# Altium PCB AX309.REV.1.0.PcbDoc (part 10 of 10)
Units mil, origin at the board's own origin, x right, y up, seen from the top; angles counter-clockwise.
Board outline 5185 x 3614 mil, 4 copper layers (Top Layer, GND, Mid-Layer 1, Bottom Layer); 191 components, 352 nets, 1106 pads, 425 vias.
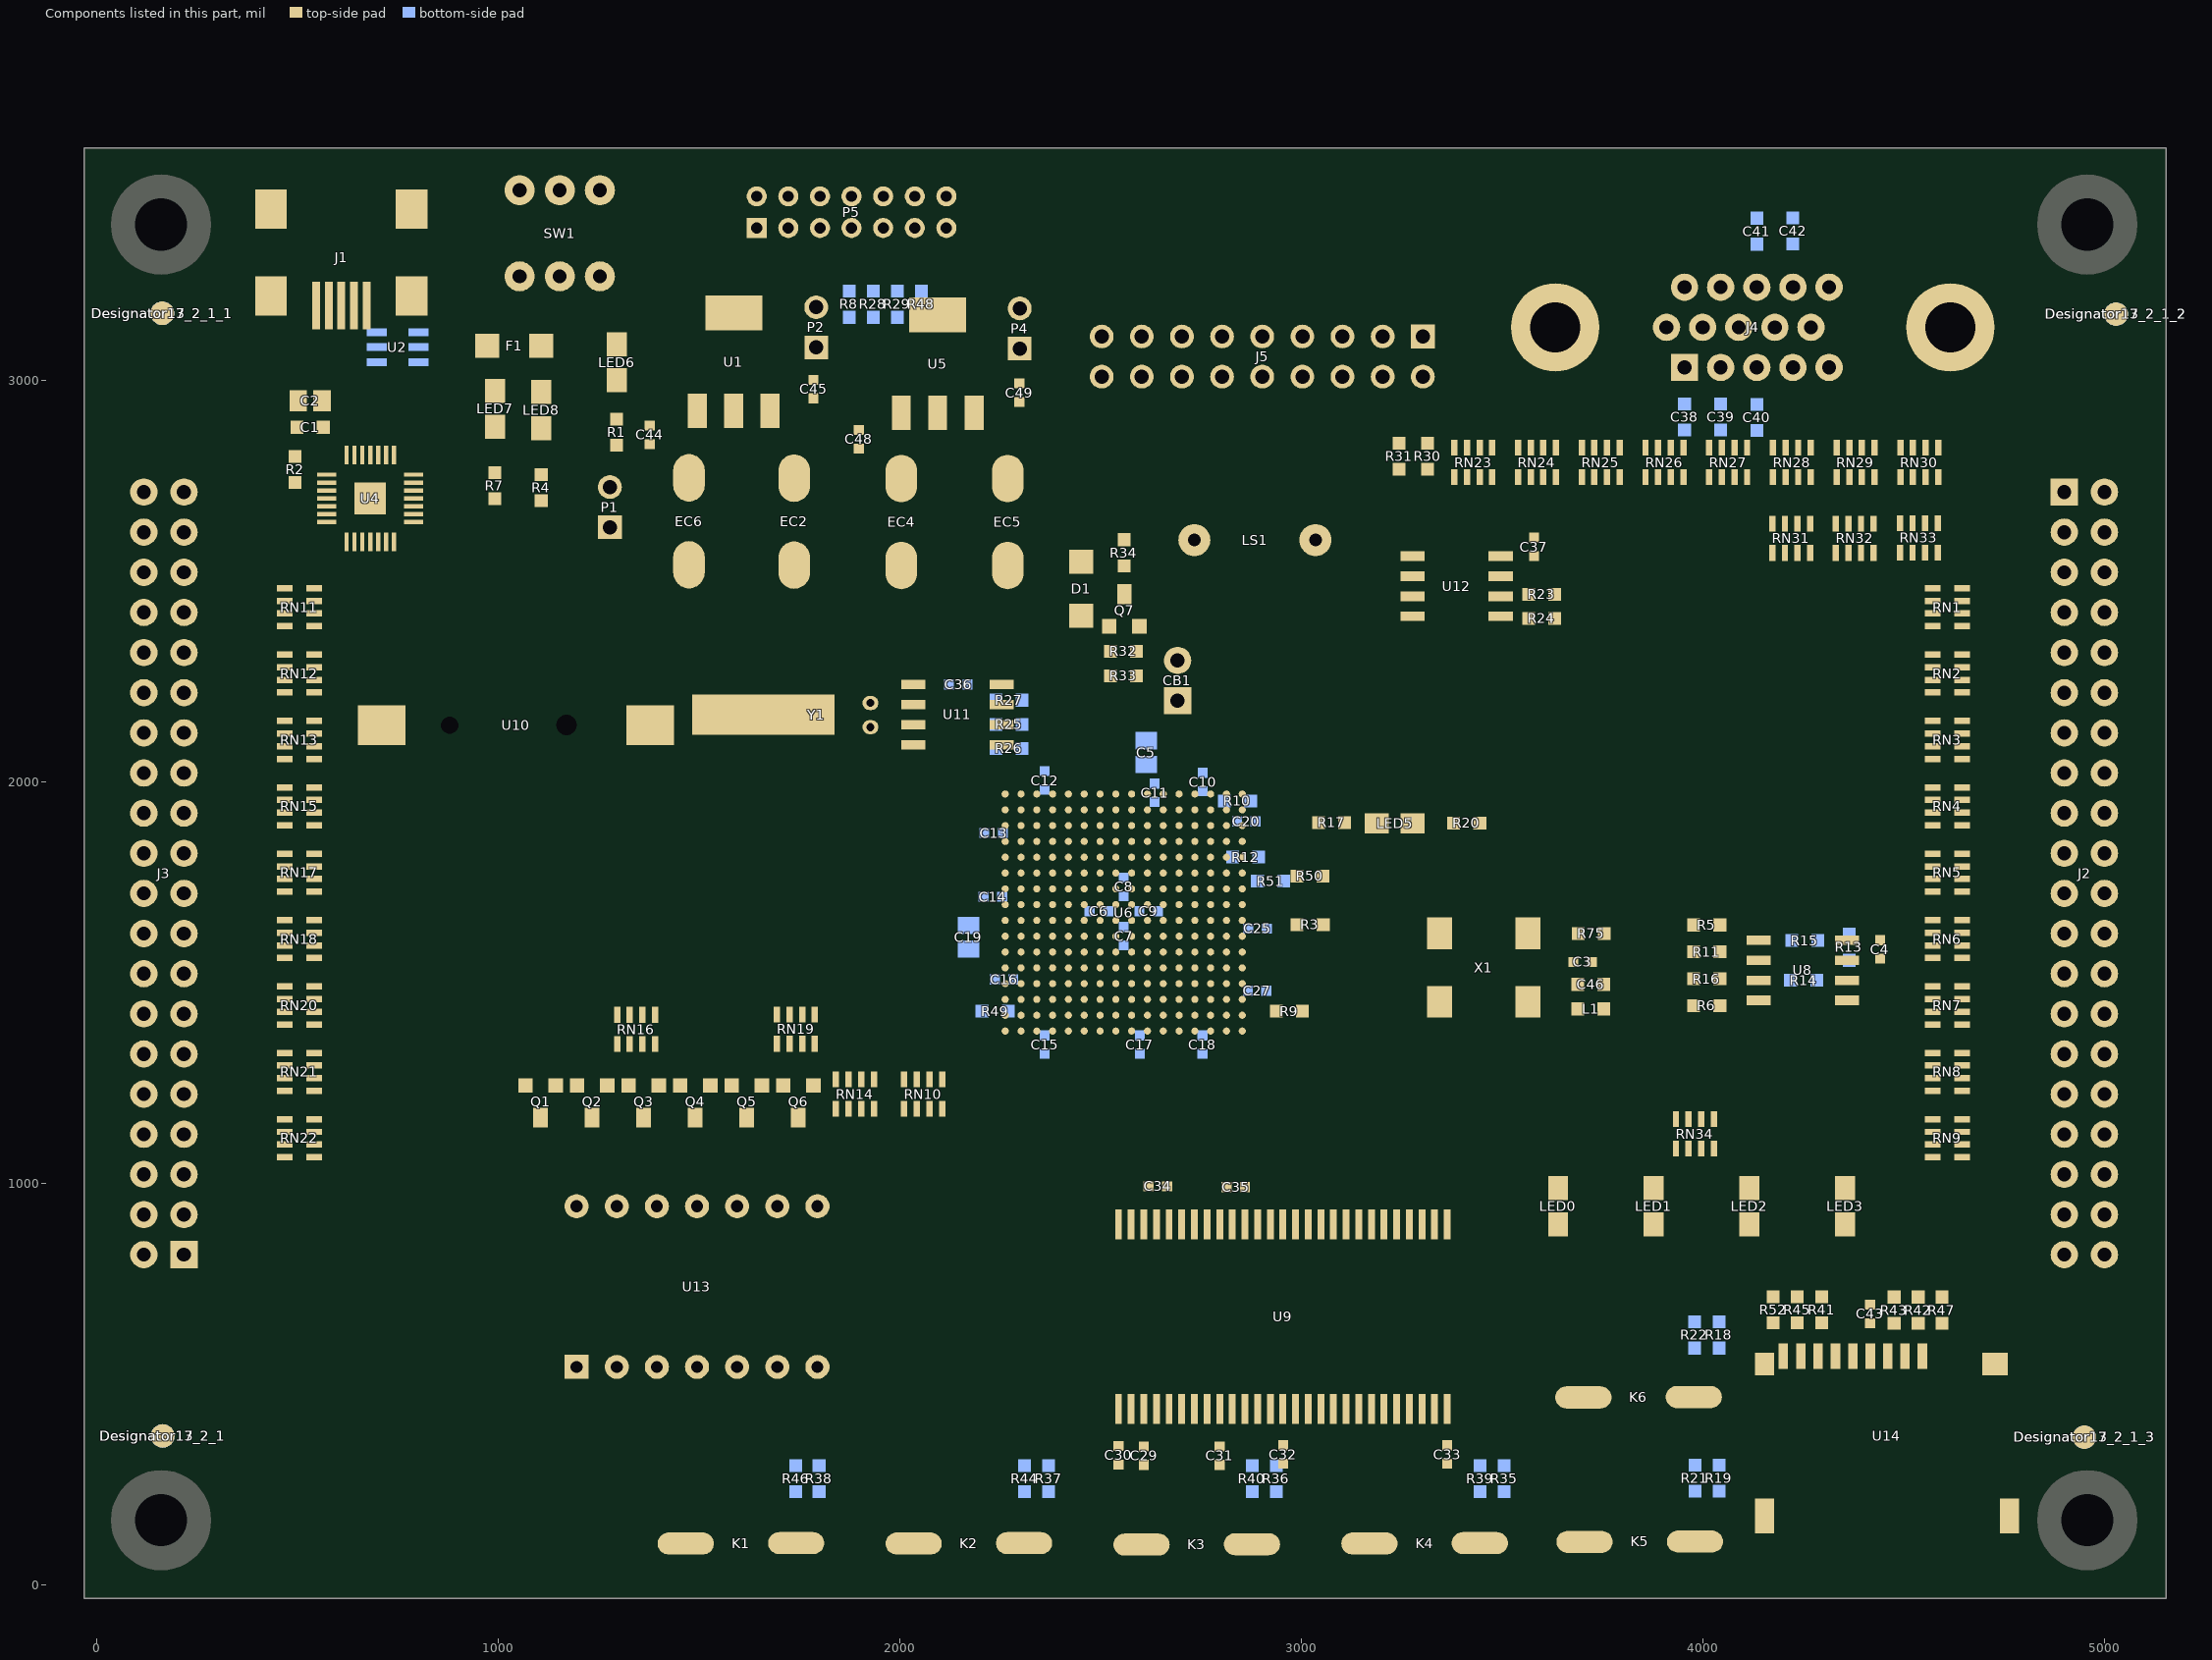
[diagram p12: the components of this part, seen from the top]

## Via types
v1: diameter 20, hole 10, Top Layer to Bottom Layer, 328 vias
v2: diameter 30, hole 15, Top Layer to Bottom Layer, 95 vias
v3: diameter 40, hole 20, Top Layer to Bottom Layer, 2 vias

## Nets (pads, with @x,y where several pads share a name; then routed paths per layer and width w, separated by ;. In a path a pad name is that pad's centre, name@x,y a point inside that pad or via, vN(x,y) a via of type N, cw(c..) or ccw(c..) an arc to the next point about the centre after c; other vN are vias at no path point) (continued)
copper on no net: (continued)
  Top Layer w0.7: 1160.7,143.2 1182.63,143.2 ; 1160.7,183.1 1200.13,183.1 ; 1160.7,183.8 1200.83,183.8 ; 1161.4,143.9 1181.93,143.9 ; 1161.4,181.7 1198.73,181.7 ; 1161.4,182.4 1199.43,182.4 ; 1162.1,144.6 1181.93,144.6 ; 1162.1,180.3 1197.33,180.3 ; 1162.1,181 1198.03,181 ; 1162.8,145.3 1181.23,145.3 ; 1162.8,179.6 1196.63,179.6 ; 1163.5,146 1181.23,146 ; 1163.5,178.2 1195.23,178.2 ; 1163.5,178.9 1195.93,178.9 ; 1164.2,146.7 1180.53,146.7 ; 1164.2,176.8 1193.83,176.8 ; 1164.2,177.5 1194.53,177.5 ; 1164.9,147.4 1180.53,147.4 ; 1164.9,175.4 1192.43,175.4 ; 1164.9,176.1 1193.13,176.1 ; 1165.6,148.1 1179.83,148.1 ; 1165.6,174.7 1191.73,174.7 ; 1166.3,148.8 1179.83,148.8 ; 1166.3,149.5 1179.13,149.5 ; 1166.3,173.3 1190.33,173.3 ; 1166.3,174 1191.03,174 ; 1167,150.2 1179.13,150.2 ; 1167,171.9 1188.93,171.9 ; 1167,172.6 1189.63,172.6 ; 1167.7,150.9 1178.43,150.9 ; 1167.7,170.5 1187.53,170.5 ; 1167.7,171.2 1188.23,171.2 ; 1168.4,151.6 1178.43,151.6 ; 1168.4,169.8 1186.83,169.8 ; 1169.1,152.3 1177.73,152.3 ; 1169.1,168.4 1185.43,168.4 ; 1169.1,169.1 1186.13,169.1 ; 1169.8,153 1177.03,153 ; 1169.8,167 1184.03,167 ; 1169.8,167.7 1184.73,167.7 ; 1170.5,153.7 1177.03,153.7 ; 1170.5,165.6 1182.63,165.6 ; 1170.5,166.3 1183.33,166.3 ; 1171.2,154.4 1176.33,154.4 ; 1171.2,164.9 1181.93,164.9 ; 1171.9,155.1 1176.33,155.1 ; 1171.9,163.5 1180.53,163.5 ; 1171.9,164.2 1181.23,164.2 ; 1172.6,155.8 1175.63,155.8 ; 1172.6,162.1 1179.13,162.1 ; 1172.6,162.8 1179.83,162.8 ; 1173.3,156.5 1175.63,156.5 ; 1173.3,160.7 1177.73,160.7 ; 1173.3,161.4 1178.43,161.4 ; 1174,157.2 1174.93,157.2 ; 1174,157.9 1174.93,157.9 ; 1174,159.3 1176.33,159.3 ; 1174,160 1177.03,160 ; 1174.7,158.6 1175.63,158.6 ; 1190.8,157.9 1259.63,157.9 ; 1191.5,156.5 1258.23,156.5 ; 1191.5,157.2 1258.93,157.2 ; 1191.5,158.6 1260.33,158.6 ; 1192.2,155.1 1257.53,155.1 ; 1192.2,155.8 1257.53,155.8 ; 1192.2,159.3 1261.03,159.3 ; 1192.9,153.7 1256.13,153.7 ; 1192.9,154.4 1256.83,154.4 ; 1192.9,160 1261.73,160 ; 1193.6,152.3 1254.73,152.3 ; 1193.6,153 1255.43,153 ; 1193.6,160.7 1262.43,160.7 ; 1194.3,150.9 1253.33,150.9 ; 1194.3,151.6 1254.03,151.6 ; 1194.3,161.4 1263.13,161.4 ; 1195,149.5 1253.33,149.5 ; 1195,150.2 1252.63,150.2 ; 1195,162.1 1263.83,162.1 ; 1195.7,148.8 1253.33,148.8 ; 1195.7,162.8 1264.53,162.8 ; 1196.4,147.4 1254.03,147.4 ; 1196.4,148.1 1254.03,148.1 ; 1196.4,163.5 1265.23,163.5 ; 1197.1,146 1254.73,146 ; 1197.1,146.7 1254.73,146.7 ; 1197.1,164.2 1265.93,164.2 ; 1197.8,144.6 1255.43,144.6 ; 1197.8,145.3 1255.43,145.3 ; 1197.8,164.9 1265.93,164.9 ; 1198.5,143.2 1256.13,143.2 ; 1198.5,143.9 1256.13,143.9 ; 1198.5,165.6 1266.63,165.6 ; 1199.2,141.8 1257.53,141.8 ; 1199.2,142.5 1256.83,142.5 ; 1199.2,166.3 1267.33,166.3 ; 1199.9,140.4 1258.23,140.4 ; 1199.9,141.1 1257.53,141.1 ; 1199.9,167 1268.03,167 ; 1200.6,139 1258.93,139 ; 1200.6,139.7 1258.23,139.7 ; 1200.6,167.7 1268.73,167.7 ; 1201.3,137.6 1259.63,137.6 ; 1201.3,138.3 1258.93,138.3 ; 1201.3,168.4 1269.43,168.4 ; 1202,136.2 1260.33,136.2 ; 1202,136.9 1259.63,136.9 ; 1202,169.1 1270.13,169.1 ; 1202.7,135.5 1260.33,135.5 ; 1202.7,169.8 1270.83,169.8 ; 1203.4,134.1 1261.03,134.1 ; 1203.4,134.8 1261.03,134.8 ; 1203.4,170.5 1271.53,170.5 ; 1204.1,132.7 1261.73,132.7 ; 1204.1,133.4 1261.73,133.4 ; 1204.1,171.2 1272.23,171.2 ; 1204.8,131.3 1263.13,131.3 ; 1204.8,132 1262.43,132 ; 1204.8,171.9 1272.93,171.9 ; 1205.5,129.9 1263.83,129.9 ; 1205.5,130.6 1263.13,130.6 ; 1205.5,172.6 1273.63,172.6 ; 1206.2,128.5 1264.53,128.5 ; 1206.2,129.2 1263.83,129.2 ; 1206.2,173.3 1274.33,173.3 ; 1206.9,127.1 1265.23,127.1 ; 1206.9,127.8 1264.53,127.8 ; 1206.9,174 1274.33,174 ; 1207.6,125.7 1265.93,125.7 ; 1207.6,126.4 1265.23,126.4 ; 1207.6,174.7 1275.03,174.7 ; 1208.3,124.3 1266.63,124.3 ; 1208.3,125 1265.93,125 ; 1208.3,175.4 1275.73,175.4 ; 1209,122.9 1267.33,122.9 ; 1209,123.6 1266.63,123.6 ; 1209,176.1 1276.43,176.1 ; 1209.7,122.2 1267.33,122.2 ; 1209.7,176.8 1277.13,176.8 ; 1210.4,120.8 1268.73,120.8 ; 1210.4,121.5 1268.03,121.5 ; 1210.4,177.5 1277.83,177.5 ; 1211.1,119.4 1269.43,119.4 ; 1211.1,120.1 1268.73,120.1 ; 1211.1,178.2 1278.53,178.2 ; 1211.8,118 1270.13,118 ; 1211.8,118.7 1269.43,118.7 ; 1211.8,178.9 1279.23,178.9 ; 1212.5,116.6 1270.83,116.6 ; 1212.5,117.3 1270.13,117.3 ; 1212.5,179.6 1279.93,179.6 ; 1213.2,115.2 1271.53,115.2 ; 1213.2,115.9 1270.83,115.9 ; 1213.2,180.3 1280.63,180.3 ; 1213.9,113.8 1272.23,113.8 ; 1213.9,114.5 1271.53,114.5 ; 1213.9,181 1281.33,181 ; 1214.6,112.4 1272.93,112.4 ; 1214.6,113.1 1272.23,113.1 ; 1214.6,181.7 1282.03,181.7 ; 1215.3,111.7 1273.63,111.7 ; 1215.3,182.4 1282.73,182.4 ; 1216,110.3 1274.33,110.3 ; 1216,111 1273.63,111 ; 1216,183.1 1282.73,183.1 ; 1216.7,108.9 1275.03,108.9 ; 1216.7,109.6 1274.33,109.6 ; 1216.7,183.8 1283.43,183.8 ; 1217.4,107.5 1275.73,107.5 ; 1217.4,108.2 1275.03,108.2 ; 1217.4,184.5 1284.13,184.5 ; 1218.1,106.8 1275.73,106.8 ; 1218.1,185.2 1284.83,185.2 ; 1218.8,105.4 1276.43,105.4 ; 1218.8,106.1 1276.43,106.1 ; 1218.8,185.9 1285.53,185.9 ; 1219.5,104 1277.13,104 ; 1219.5,104.7 1277.13,104.7 ; 1219.5,186.6 1286.23,186.6 ; 1220.2,102.6 1277.83,102.6 ; 1220.2,103.3 1277.83,103.3 ; 1220.2,187.3 1286.93,187.3 ; 1220.9,101.2 1279.23,101.2 ; 1220.9,101.9 1278.53,101.9 ; 1220.9,188 1287.63,188 ; 1221.6,99.8 1279.93,99.8 ; 1221.6,100.5 1279.23,100.5 ; 1221.6,188.7 1288.33,188.7 ; 1222.3,98.4 1280.63,98.4 ; 1222.3,99.1 1279.93,99.1 ; 1222.3,189.4 1289.03,189.4 ; 1223,97 1281.33,97 ; 1223,97.7 1280.63,97.7 ; 1223,190.1 1289.73,190.1 ; 1223.7,95.6 1282.03,95.6 ; 1223.7,96.3 1281.33,96.3 ; 1223.7,190.8 1290.43,190.8 ; 1224.4,94.2 1282.73,94.2 ; 1224.4,94.9 1282.03,94.9 ; 1224.4,191.5 1291.13,191.5 ; 1225.1,92.8 1283.43,92.8 ; 1225.1,93.5 1282.73,93.5 ; 1225.1,192.2 1291.83,192.2 ; 1225.8,91.4 1284.13,91.4 ; 1225.8,92.1 1284.13,92.1 ; 1225.8,192.9 1291.83,192.9 ; 1226.5,90 1284.83,90 ; 1226.5,90.7 1284.83,90.7 ; 1226.5,193.6 1292.53,193.6 ; 1227.2,89.3 1285.53,89.3 ; 1227.2,194.3 1293.23,194.3 ; 1227.9,87.9 1286.23,87.9 ; 1227.9,88.6 1285.53,88.6 ; 1227.9,195 1293.93,195 ; 1228.6,86.5 1286.93,86.5 ; 1228.6,87.2 1286.23,87.2 ; 1228.6,195.7 1294.63,195.7 ; 1229.3,85.1 1287.63,85.1 ; 1229.3,85.8 1286.93,85.8 ; 1229.3,196.4 1295.33,196.4 ; 1230,83.7 1288.33,83.7 ; 1230,84.4 1287.63,84.4 ; 1230,197.1 1296.03,197.1 ; 1230,197.8 1296.73,197.8 ; 1230.7,82.3 1289.03,82.3 ; 1230.7,83 1288.33,83 ; 1230.7,198.5 1297.43,198.5 ; 1231.4,80.9 1289.73,80.9 ; 1231.4,81.6 1289.73,81.6 ; 1231.4,199.2 1298.13,199.2 ; 1232.1,79.5 1290.43,79.5 ; 1232.1,80.2 1290.43,80.2 ; 1232.1,199.9 1298.83,199.9 ; 1232.8,78.1 1291.13,78.1 ; 1232.8,78.8 1291.13,78.8 ; 1232.8,200.6 1299.53,200.6 ; 1233.5,76.7 1291.83,76.7 ; 1233.5,77.4 1291.83,77.4 ; 1233.5,201.3 1300.23,201.3 ; 1234.2,75.3 1292.53,75.3 ; 1234.2,76 1292.53,76 ; 1234.2,202 1300.23,202 ; 1234.9,73.9 1293.23,73.9 ; 1234.9,74.6 1293.23,74.6 ; 1234.9,202.7 1300.93,202.7 ; 1235.6,72.5 1294.63,72.5 ; 1235.6,73.2 1293.93,73.2 ; 1235.6,203.4 1301.63,203.4 ; 1235.6,204.1 1302.33,204.1 ; 1236.3,71.1 1295.33,71.1 ; 1236.3,71.8 1294.63,71.8 ; 1236.3,204.8 1303.03,204.8 ; 1237,70.4 1295.33,70.4 ; 1237,205.5 1303.73,205.5 ; 1237.7,69 1296.03,69 ; 1237.7,69.7 1296.03,69.7 ; 1237.7,206.2 1304.43,206.2 ; 1238.4,67.6 1296.73,67.6 ; 1238.4,68.3 1296.73,68.3 ; 1238.4,206.9 1305.13,206.9 ; 1239.1,66.2 1297.43,66.2 ; 1239.1,66.9 1297.43,66.9 ; 1239.1,207.6 1305.83,207.6 ; 1239.8,64.8 1298.13,64.8 ; 1239.8,65.5 1298.13,65.5 ; 1239.8,208.3 1306.53,208.3 ; 1240.5,63.4 1298.83,63.4 ; 1240.5,64.1 1298.83,64.1 ; 1240.5,209 1307.23,209 ; 1240.5,209.7 1307.93,209.7 ; 1241.2,62 1300.23,62 ; 1241.2,62.7 1299.53,62.7 ; 1241.2,210.4 1308.63,210.4 ; 1241.9,60.6 1300.93,60.6 ; 1241.9,61.3 1300.23,61.3 ; 1241.9,211.1 1308.63,211.1 ; 1242.6,59.9 1300.93,59.9 ; 1242.6,211.8 1309.33,211.8 ; 1243.3,212.5 1310.03,212.5 ; 1244,213.2 1310.73,213.2 ; 1244.7,213.9 1311.43,213.9 ; 1245.4,214.6 1312.13,214.6 ; 1245.4,215.3 1312.83,215.3 ; 1246.1,216 1313.53,216 ; 1246.8,216.7 1314.23,216.7 ; 1247.5,217.4 1314.93,217.4 ; 1248.2,218.1 1315.63,218.1 ; 1248.9,218.8 1316.33,218.8 ; 1249.6,219.5 1317.03,219.5 ; 1250.3,220.2 1317.03,220.2 ; 1250.3,220.9 1317.73,220.9 ; 1251,221.6 1318.43,221.6 ; 1251.7,222.3 1319.13,222.3 ; 1252.4,223 1319.83,223 ; 1253.1,223.7 1320.53,223.7 ; 1253.8,224.4 1321.23,224.4 ; 1254.5,225.1 1321.93,225.1 ; 1255.2,225.8 1322.63,225.8 ; 1255.2,226.5 1323.33,226.5 ; 1255.9,227.2 1324.03,227.2 ; 1256.6,227.9 1324.73,227.9 ; 1257.3,228.6 1325.43,228.6 ; 1258,229.3 1325.43,229.3 ; 1258.7,230 1326.13,230 ; 1259.4,230.7 1326.83,230.7 ; 1260.1,231.4 1327.53,231.4 ; 1260.8,232.1 1328.23,232.1 ; 1260.8,232.8 1328.93,232.8 ; 1261.5,233.5 1329.63,233.5 ; 1262.2,234.2 1330.33,234.2 ; 1262.9,234.9 1331.03,234.9 ; 1263.6,235.6 1331.73,235.6 ; 1264.3,236.3 1332.43,236.3 ; 1265,237 1333.13,237 ; 1265.7,237.7 1333.83,237.7 ; 1265.7,238.4 1333.83,238.4 ; 1266.4,239.1 1334.53,239.1 ; 1267.1,239.8 1335.23,239.8 ; 1267.8,240.5 1335.93,240.5 ; 1268.5,241.2 1336.63,241.2 ; 1269.2,241.9 1337.33,241.9 ; 1269.9,242.6 1338.03,242.6 ; 1270.6,243.3 1338.73,243.3 ; 1270.6,244 1339.43,244 ; 1271.3,244.7 1340.13,244.7 ; 1272,245.4 1340.83,245.4

## Polygon pours and split planes (outlines as drawn)
D1V2 on Mid-Layer 1 "Bottom Layer-No Net" (solid, pour order 2): 2453,1779 2660.95,1779 2662,1779 2662,1568 2454.05,1568 2453,1568 2453,1779
D3V3 on Bottom Layer "Bottom Layer-No Net" (solid, remove dead copper, pour order 3): 2300,1963 2915,1963 2915,1807 2915,1382 2747,1382 2300,1382 2300,1963
GND on Bottom Layer "Bottom Layer-No Net" (hatched 45Degree grid 20 track 8, remove dead copper, pour order 6): 120.71,3543.01 5118.11,3543.01 5118.11,3388 5118.11,0 4969,0 0,0 0,297 0,3543.31 121.01,3543.31
GND on GND (split plane): 5133.9,3242.3 5133.9,-14.6 -10.9,-14.6 -10.9,3559.2 5133.9,3559.2

## Keep-outs
Keep-Out Layer:
  lines w8: 0,121.01 0,3422.3 cw(c120.71,3422.3) 120.71,3543.01 ; 0.29,121.01 ccw(c121,121.01) 121,0.3 ; 117,0 4997.29,0 ccw(c4997.3,120.71) 5118.01,120.71 ; 121.01,3543.31 4997.29,3543.31 ; 4997.29,3543.01 cw(c4997.29,3422.3) 5118,3422.3 ; 5118.11,117.3 5118.11,3422.3

## Other copper
Top Layer:
  rectangle net VCC: 1219,3228 1579,3512
  rectangle net D3V3: 2398,207 2454,440
  rectangle net D3V3: 3821,1431 3878,1487
  rectangle net NetC3_1: 3533,1412 3691,1543
  rectangle net VBUS: 662,3066 733,3246
  rectangle net GND: 482,3049 556,3245
  rectangle net NetF1_2: 1111,3068 1196,3514
  rectangle net VBUS: 662,3056 1002,3116
  rectangle net D3V3: 1563,2697 1611,3182
  rectangle net D3V3: 1241,2697 1611,2854
  rectangle net VCC: 1654,2695 1806,2969
  rectangle net D1V2: 2072,2690 2119,3206
  rectangle net D1V2: 1885,2690 2119,2844
  rectangle net D3V3: 2162,2686 2314,2963
  rectangle net GND: 1364,2874 1520,3085
  rectangle net GND: 1885,2863 2028,2963
  rectangle net GND: 1246,2474 2316,2607
  rectangle net GND: 4130,130 4179,310
  rectangle net GND: 4741,127 4788,311
  rectangle net GND: 4697,438 4761,576
  rectangle net D1V2: 2023,3120 2333,3213
  rectangle net VCC: 551,2791 627,2840
  rectangle net GND: 651,2092 768,2287
  rectangle net VCC: 549,2759 597,2840
  rectangle net NetF1_2: 1077,3053 1196,3107
  rectangle net GND: 3313,1583 3420,1662
  rectangle net GND: 1249,2482 1307,2661
Mid-Layer 1:
  rectangle net D3V3: 3818,1358 3877,1487
  rectangle net D1V2: 1894,2679 2579,2857
  rectangle net D1V2: 2537,1735 2579,2833
  rectangle net D3V3: 1237,2694 1612,2863
Bottom Layer:
  rectangle net GND: 4843,874 5059,970
  rectangle net GND: 4853,2669 4951,2769.65
  rectangle net GND: 3858,3084.73 4129.65,3176
  rectangle net GND: 54,2576 274,2670
  rectangle net GND: 169,773.65 265,871.65
  rectangle net D3V3: 2654,1535 2697,1577
  rectangle net D3V3: 2575.5,1740 2620,1778.5
  rectangle net D3V3: 2215,2867 2316,2962
  rectangle net D3V3: 1242,2694 1613,3026
  rectangle net D3V3: 2419,1768.03 2463,1814
  rectangle net D3V3: 1418,1652 1507,2767
  rectangle net D3V3: 1418,1619 2317,1689
  rectangle net D3V3: 2260,1465.86 2305.5,1576
  rectangle net D3V3: 2810,1468 2846,1505
  rectangle net D3V3: 2812,1842.3 2846,1923.5
  rectangle net D3V3: 2613,1847 2659,1892
  rectangle net D3V3: 2862,1782 2915,1851.17
  rectangle net D3V3: 2245,1858 2304,1885
  rectangle net D3V3: 2455,1733 2501,1776
  rectangle net D3V3: 2243,1682 2303,1726

## Silkscreen, mask and mechanical layers (free items; w line width, h text height)
Top Overlay:
  drawing of 6031 lines, arcs and shapes, not listed
  text "PWR" at 895,3362 h80 r90
  text "VGA" at 3482,3361 h80 r90
  text "5V" at 1899,3159 h60 r90
  text "1.2V" at 2413,3141 h60 r90
  text "【39】" at 193,3112 h80 r270
  text "【40】" at 80,3111 h80 r270
  text "PWR" at 1235,3021 h60 r90
  text "GND" at 1899,2992 h60 r90
  text "GND" at 2415,2985 h60 r90
  text "【1】" at 4924,2964 h80 r90
  text "【2】" at 5031,2964 h80 r90
  text "CAMERA" at 2759,2867 h80
  text "3.3V" at 1201,2709 h60 r90
  text "IO: 3.3V" at 4769,2574 h100 r90
  text "GND" at 1201,2545 h60 r90
  text "IO: 3.3V" at 352,944 h100 r270
  text "【2】" at 93,573 h80 r270
  text "【1】" at 193,573 h80 r270
  text "【39】" at 4924,438 h80 r90
  text "【40】" at 5037,435 h80 r90
Bottom Overlay:
  lines w8: 301.61,1567.33 660,1567.33 ; 302,1067.33 660,1067.33 ; 302,1267.33 660,1267.33 ; 302.31,2167.33 657,2167.33 ; 302.62,1367.33 660,1367.33 ; 303,867.33 660,867.33 660,969.33 303,969.33 ; 303,1167.33 659,1167.33 ; 303,1467.33 659.16,1467.33 ; 303,1666.33 660,1666.33 ; 303,1767.33 659,1767.33 ; 303,1867.33 657,1867.33 ; 303,1967.33 659,1967.33 ; 303,2068.33 656.86,2068.33 ; 303,2267.33 656.87,2267.33 ; 303,2367.33 657,2367.33 ; 303,2467.33 659,2467.33 ; 303,2570.33 658,2570.33 ; 303,2667.33 657,2667.33 ; 478,767.68 479,767.68 479,2770.33 ; 4471,1871.67 4828,1871.67 ; 4471,1970.67 4829.39,1970.67 ; 4471,2170.67 4828.38,2170.67 ; 4471,2270.67 4829,2270.67 ; 4471,2470.67 4829,2470.67 ; 4471.84,2070.67 4828,2070.67 ; 4472,1070.67 4828,1070.67 ; 4472,1570.67 4828,1570.67 ; 4472,1770.67 4828,1770.67 ; 4472,2370.67 4828,2370.67 ; 4473,967.67 4828,967.67 ; 4474,870.67 4828,870.67 ; 4474,1170.67 4828,1170.67 ; 4474,1370.67 4828.69,1370.67 ; 4474,1670.67 4828,1670.67 ; 4474.13,1270.67 4828,1270.67 ; 4474.14,1469.67 4828,1469.67 ; 4652,767.67 4652,2770.32 4653,2770.32 ; 4828,2568.67 4471,2568.67 4471,2670.67 4828,2670.67
  lines w12: 303,2770.33 303,767.33 660,767.33 660,2772.33 303,2772.33 ; 4828,765.67 4471,765.67 4471,2770.67 4828,2770.67 4828,767.67
  text "【1】" at 4618,2806 h80
  text "【2】" at 4793,2804.38 h80
  text "3V3" at 647,2695 h80
  text "GND" at 4634,2694.67 h80
  text "3V3" at 468,2693 h80
  text "VCC" at 4815,2691.91 h80
  text "K16" at 4634,2594 h80
  text "J16" at 4815,2594 h80
  text "GND" at 468,2592 h80
  text "GND" at 647,2592 h80
  text "H16" at 468,2494 h80
  text "K15" at 4815,2494 h80
  text "L16" at 4634,2493 h80
  text "H15" at 647,2491 h80
  text "M15" at 4634,2397 h80
  text "M16" at 4815,2395 h80
  text "G16" at 468,2392 h80
  text "F16" at 647,2392 h80
  text "E16" at 647,2294 h80
  text "N16" at 4815,2293 h80
  text "F15" at 468,2292 h80
  text "P16" at 4634,2292 h80
  text "R16" at 4634,2195.67 h80
  text "P15" at 4815,2192.67 h80
  text "D11" at 468,2191 h80
  text "C10" at 647,2191 h80
  text "T15" at 4634,2095 h80
  text "C9" at 647,2093 h80
  text "R15" at 4815,2093.67 h80
  text "E11" at 468,2092 h80
  text "T14" at 4634,1995 h80
  text "E15" at 468,1993 h80
  text "R14" at 4815,1992.67 h80
  text "D16" at 647,1991 h80
  text "R12" at 4634,1895 h80
  text "C16" at 468,1894 h80
  text "T13" at 4815,1893 h80
  text "C15" at 647,1892 h80
  text "T12" at 4815,1794 h80
  text "R9" at 4634,1793 h80
  text "B16" at 468,1792 h80
  text "B15" at 647,1792 h80
  text "L8" at 4634,1695 h80
  text "T9" at 4815,1694 h80
  text "B14" at 468,1692 h80
  text "A14" at 647,1692 h80
  text "T7" at 4815,1596 h80
  text "R7" at 4634,1593 h80
  text "A13" at 468,1592.13 h80
  text "B12" at 647,1592.13 h80
  text "T5" at 4634,1495 h80
  text "A11" at 647,1494 h80
  text "T6" at 4815,1494 h80
  text "A12" at 468,1492 h80
  text "T4" at 4634,1396 h80
  text "R5" at 4810,1393.88 h80
  text "B10" at 468,1391.82 h80
  text "A10" at 647,1391 h80
  text "R2" at 4809,1295 h80
  text "R1" at 4633,1293 h80
  text "A9" at 468,1292 h80
  text "C8" at 647,1288 h80
  text "P2" at 4634,1196 h80
  text "A8" at 468,1192 h80
  text "B8" at 647,1192 h80
  text "M4" at 4810,1191 h80
  text "P6" at 4634,1096 h80
  text "N6" at 4811,1095 h80
  text "A7" at 468,1090 h80
  text "A6" at 647,1090 h80
  text "A5" at 647,994 h80
  text "M5" at 4634,993 h80
  text "N4" at 4815,992 h80
  text "B6" at 468,991 h80
  text "B5" at 468,893 h80
  text "A4" at 647,892 h80
  text "GND" at 4634,890.67 h80
  text "GND" at 4815,890.67 h80
  text "VCC" at 468,793 h80
  text "GND" at 647,793 h80
  text "3V3" at 4634,792.67 h80
  text "3V3" at 4815,790.67 h80
  text "【2】" at 450,681 h80
  text "【1】" at 629,678 h80
  text "AX309" at 1136,55 h200
Top Solder:
  rectangle: 313,35 1351,272
Mechanical 4:
  circle w10: c160,160 r64.41
  circle w10: c160,3388 r65.12
  circle w10: c4958.11,3388 r64.8
  circle w10: c4958.11,160 r64.22
  lines w8: 0,3422 0,3178 ccw(c28.39,3178) 28.39,3149.61 368,3149.61 368,393.7 29,393.7 ccw(c29,364.99) 0.29,364.99 ; 0,3422.6 cw(c120.71,3422.6) 120.71,3543.31 ; 0.29,120.71 0.29,364.99 ; 0.29,121.31 ccw(c121,121.31) 121,0.6 ; 0.29,363 0.29,364.99 ; 120.71,3542.71 955.45,3542.71 ; 121,0 1315,0 ccw(c1315,27) 1342,27 1342,28 ; 953,3542.71 955.45,3542.71 ; 1320.81,3200.95 2389,3200.95 2389,3505 2389,3517.31 cw(c2415,3517.31) 2415,3543.31 4997.29,3543.31 cw(c4997.29,3422.6) 5118,3422.6 ; 1321,3200.95 986.16,3200.95 986.16,3512 ccw(c955.45,3512) 955.45,3542.71 ; 1342.24,27.24 1342.24,256 4114,256 4114,26 ccw(c4140,26) 4140,0 4997.3,0 ; 4997.3,0.3 ccw(c4997.3,121.01) 5118.01,121.01 ; 5118.01,120.41 5118.01,365.9 5118.11,366 ; 5118,3422 5118.11,3422 5118.11,3178.72 ; 5118.11,367.7 ccw(c5092.11,367.7) 5092.11,393.7 4745,393.7 4745,3149.61 5089,3149.61 ccw(c5089,3178.72) 5118.11,3178.72 ; 5118.11,3203 5118.11,3178.72

## Dimensions
121.01,3543.31 to 117,0 on Drill Drawing
0,121.01 to 5118.11,117.3 on Drill Drawing

## Text inside footprints (layer, text, board x,y; h text height)
J5: Top Overlay "1" at 3403,3129.17 h60 r180; Top Overlay "2" at 3408,3019.17 h60 r180